# EAGLE board Switchbrd (EAGLE 9.6.1)
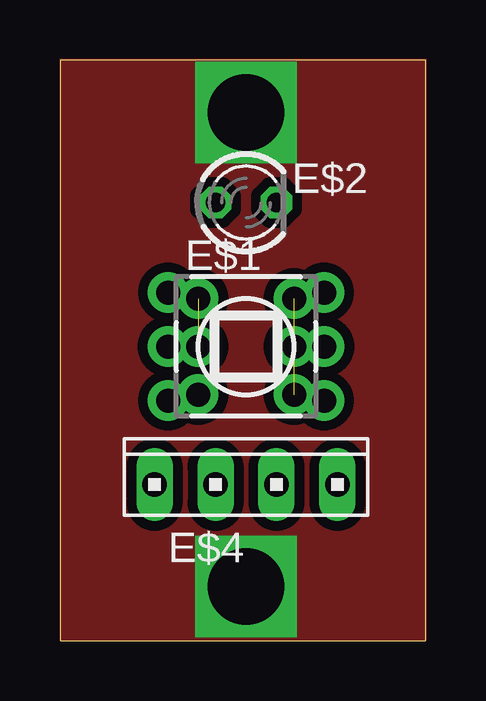
[diagram p0: board, top side]
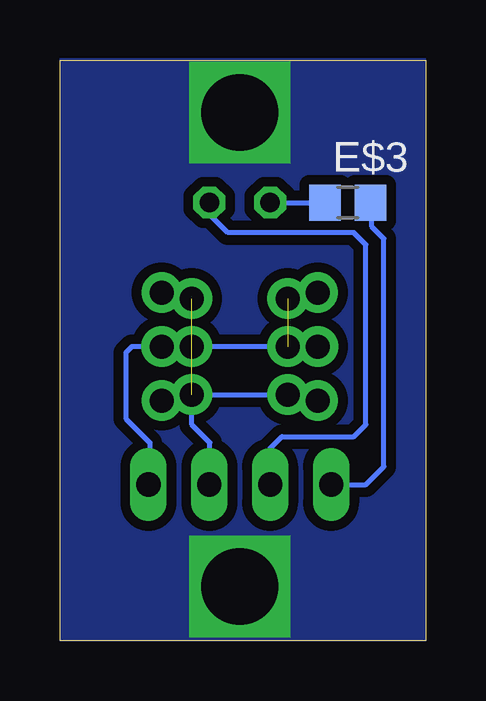
[diagram p1: board, bottom side, seen from below]

Size 15.24 x 24.19 mm. Coordinates in mm from the lower left corner, seen from the top.
Outline: 0,0 15.24,0 15.24,24.19 0,24.19 0,0
Copper layers (1*16): Top 0.035mm / dielectric 1.5mm / Bottom 0.035mm
Design rules "default *": minimum track width 6mil, minimum drill 0.35mm, track to track 6mil, track to pad 6mil, pad to pad 6mil, via to via 6mil, smd to smd 6mil, copper to edge 0mil, drill to drill 6mil, minimum pad ring 10mil, minimum via ring 8mil, stop-mask expansion 4mil, vias tented up to drill 0mil, thermal gap 10mil

## Footprints (pad centres in the part's own frame; a part is rotated, then mirrored left to right if it is on the bottom)
TL1105SP = drill 1 pad 1.676: 1 -2.25,3.25; 2 2.25,3.25; 3 -2.25,-3.25; 4 2.25,-3.25
LED3MM = drill 0.813 octagon: A -1.27,0; K 1.27,0
R0805 = smd 1.3 x 1.5: 1 -0.95,0; 2 0.95,0
10X04MTA = drill 1.016 long: 1 3.81,0; 2 1.27,0; 3 -1.27,0; 4 -3.81,0

## Placement (x,y rotation side)
E$1  [TL1105SP]  7.75,12.25 270 top
E$2  [LED3MM]  7.75,18.25 0 top
E$3  [R0805]  3.25,18.25 0 bottom
E$4  [10X04MTA]  7.75,6.5 0 top

## Library data of the parts
E$1 = switch
E$2 = led
E$3 = rcl
E$4 = con-amp

## Nets
S$3: E$1.2 E$1.4

## Tracks (layer width: path | path; a pad name or v marks a point on that pad's centre or on a via)
GND  (via drill 3.2)
  other vias: 7.75,2.25 7.75,22
  pour Bottom (isolate 0.406, no thermals): 0,24.25 15.25,24.25 15.25,0 0,0
  pour Top (isolate 0.406, no thermals): 0,24.25 15.25,24.25 15.25,0 0,0
S$3  (via drill 1 pad 1.7)  (3 unrouted)
  Bottom 0.203: 9,6.5 9,8.25 9.75,9 v9.75,10.25 | E$1.2 10,10 v9.75,10.25 | v9.75,10.25 v5.75,10.25 5.5,10 E$1.4 | v4.5,12.25 v5.75,12.25 v9.75,12.25 v11,12.25 12.25,12.25 12.5,12 12.5,9.25 11.5,8.25 11.5,6.5
  other vias: 5.75,14.25 9.75,14.25
S$6
  Bottom 0.203: 6.5,18.25 4.25,18.25
S$8
  Bottom 0.203: 4,6.5 2.5,6.5 1.75,7.25 1.75,16.75 2.25,17.25 2.25,18.25
S$9
  Bottom 0.203: 6.5,6.5 6.5,8 6,8.5 3,8.5 2.5,9 2.5,16.5 3,17 8.25,17 9,17.75 9,18.25